# Altium PCB featherULP.PcbDoc
Units mm, origin at the board's own origin, x right, y up, seen from the top; angles counter-clockwise.
Board outline 50.8 x 22.86 mm, 2 copper layers (Top, Bottom), stack 1.57 mm thick; 19 components, 28 nets, 77 pads, 0 vias.
Unrouted connection lines stored in the file: 38.
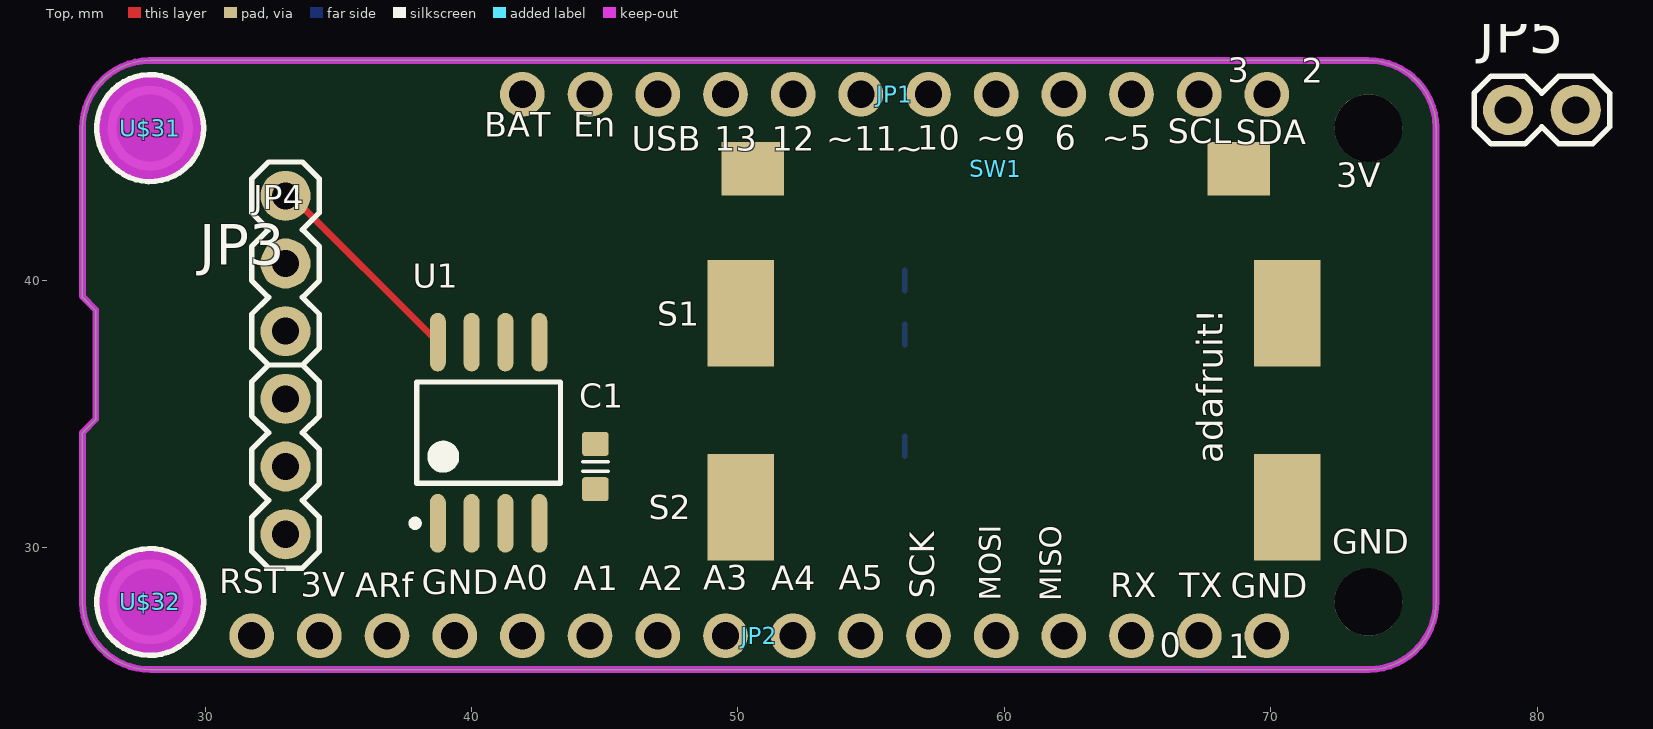
[diagram p0: Top view]
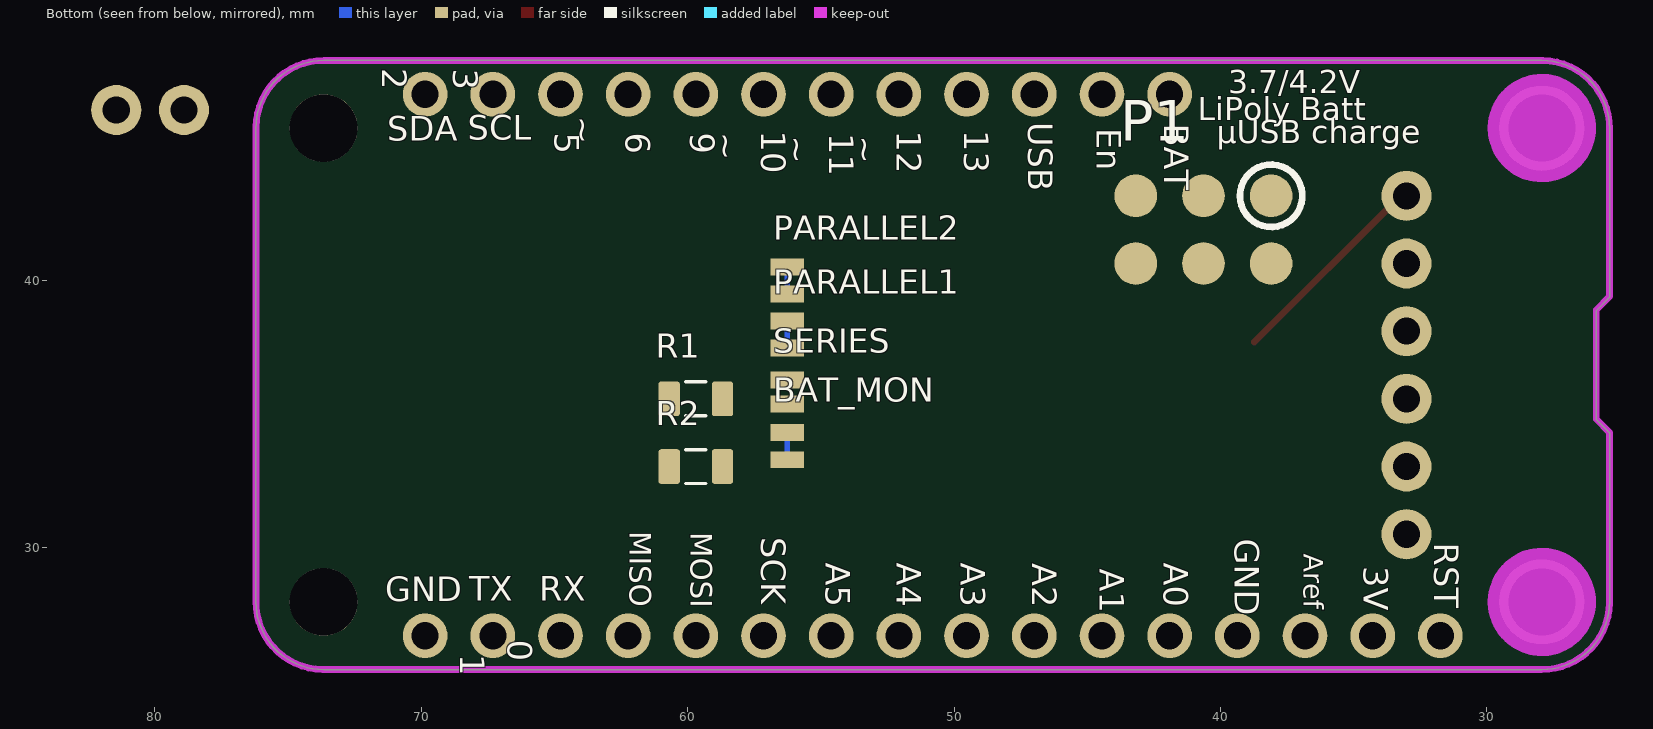
[diagram p1: Bottom view, seen from below]

## Layer stack, top to bottom
Top Solder: solder mask 0.0102, Solder Resist, Dk 3.5
Top: signal copper 0.035
Dielectric 1: core 1.5, FR-4, Dk 4.8
Bottom: signal copper 0.035
Bottom Solder: solder mask 0.0102, Solder Resist, Dk 3.5

## Board outline
27.94,25.4 73.66,25.4 ccw(c73.66,27.94) 76.2,27.94 76.2,45.72 ccw(c73.66,45.72) 73.66,48.26 27.94,48.26 ccw(c27.94,45.72) 25.4,45.72 25.4,39.37 25.908,38.862 25.908,34.798 25.4,34.29 25.4,27.94 ccw(c27.94,27.94)

## Design rules (kind name [scope] priority, off if disabled: settings)
Clearance [All] p1: gap=0.2
Clearance "Clearance (Same Net)" [All] p2: gap=0 except(0.203: SMDPad-SMDPad SMDPad-THPad SMDPad-Via)
HoleSize HoleSize_1 [All] p1: absolutevalues=TRUE maxlimit=2540 minlimit=0.394 maxpercent=80.000 minpercent=20.000
HoleSize [All] p2: absolutevalues=TRUE maxlimit=2.54 minlimit=0.025 maxpercent=80.000 minpercent=20.000
HoleToHoleClearance mdViaViaSameLayer [All] p1: gap=0.203 allowstackedmicrovias=TRUE
HoleToHoleClearance [All] p2: gap=0.254 allowstackedmicrovias=TRUE
PasteMaskExpansion mlMinCreamFrame [All] p1: expansion=0
PasteMaskExpansion [All] p2: expansion=0
PolygonConnect ThermalVias [IsVia] p1: connectstyle=Direct reliefconductorwidth=0.254 reliefentries=4 polygonreliefangle="90 Angle" airgapwidth=0.254
PolygonConnect [All] p2: connectstyle=Relief reliefconductorwidth=0.254 reliefentries=4 polygonreliefangle="90 Angle" airgapwidth=0.254
RoutingVias [All] p1: holewidth=0.711 width=1.27 viastyle="Through Hole" minholewidth=0.711 minwidth=1.27 maxholewidth=0.711 maxwidth=1.27
SilkToSilkClearance [All] p1 off: silktosilkclearance=0.254
SilkToSolderMaskClearance [IsPad] p1 off: minsilkscreentomaskgap=0.254 clearancetoexposedcopper=TRUE
SolderMaskExpansion mlMinStopFrame [All] p1: expansion=0.051
SolderMaskExpansion [All] p2: expansion=0.102
Width Width_1 [All] p1: maxlimit=1 minlimit=0.2 preferedwidth=0.25 minimp=50.000000 maximp=50.000000 favimp=50.000000
Width [All] p2: maxlimit=1 minlimit=0.2 preferedwidth=0.25 minimp=50.000000 maximp=50.000000 favimp=50.000000
25 further rules are at their usual default settings.

## Components (designator, comment, footprint, x,y, rotation, side; value= is the part's Value field where it differs from the comment)
BAT_MON "JUMPER-PAD-2-NC_BY_TRACENO_SILK" PAD-JUMPER-2-NC_BY_TRACE_NO_SILK 56.261,33.782 r90 bottom
C1 "approved sub OK" CAPC1608X90N 44.65,33.02 r270 top
JP1 "HEADER-1X12" 1X12_ROUND 55.88,46.99 r0 top
JP2 "HEADER-1X16ROUND" 1X16_ROUND 50.8,26.67 r180 top
JP3 "Header 3Standard 3-pin 0.1\" header. Use with straight break away headers (SKU : PRT-00116), right angle break away headers (PRT-00553), swiss pins (PRT-00743), machine pins (PRT-00117), and female headers (PRT-00115). Molex polarized connector foot print use with SKU : PRT-08232 with associated crimp pins and housings." 1X03 33.02,30.48 r90 top
JP4 "Header 3Standard 3-pin 0.1\" header. Use with straight break away headers (SKU : PRT-00116), right angle break away headers (PRT-00553), swiss pins (PRT-00743), machine pins (PRT-00117), and female headers (PRT-00115). Molex polarized connector foot print use with SKU : PRT-08232 with associated crimp pins and housings." 1X03 33.02,38.1 r90 top
JP5 "Standard 2-pin 0.1\" header. Use with  - straight break away headers ( PRT-00116) - right angle break away headers (PRT-00553) - swiss pins (PRT-00743) - machine pins (PRT-00117) - female headers (PRT-00115)   Molex polarized connector foot print use with: PRT-08233 with associated crimp pins and housings.  2.54_SCREWTERM for use with  PRT-10571.  3.5mm Screw Terminal footprints for  PRT-08084  5mm Screw Terminal footprints for use with PRT-08432" 1X02 78.9,46.4 r0 top
P1 "ICSP" "ICSP Pads - SMD" 38.1,43.18 r270 bottom
PARALLEL1 "JUMPER-PAD-2-NC_BY_TRACENO_SILK" PAD-JUMPER-2-NC_BY_TRACE_NO_SILK 56.261,37.973 r90 bottom
PARALLEL2 "JUMPER-PAD-2-NC_BY_TRACENO_SILK" PAD-JUMPER-2-NC_BY_TRACE_NO_SILK 56.261,40.005 r90 bottom
R1 "Thick Film" RESC2012X70N 59.69,35.56 r180 bottom
R2 "Thick Film" RESC2012X70N 59.69,33.02 r0 bottom
S1 "Solar Cell" "Solar Cell IXYS  KXOB22-01X8L-ND" 70.612,38.767 r180 top
S2 "Solar Cell" "Solar Cell IXYS  KXOB22-01X8L-ND" 70.612,31.493 r180 top
SERIES "JUMPER-PAD-2-NO" PAD-JUMPER-2-NO_NO_SILK 56.261,35.814 r90 bottom
SW1 "Reed Switch" "Reed Switch MDSM-4" 68.8,44.2 r180 top
U1 "ATtiny45-20SH" 8S2_N 40.64,34.29 r90 top
U$31 "MOUNTINGHOLE2.5" MOUNTINGHOLE_2.5_PLATED 27.94,45.72 r270 top
U$32 "MOUNTINGHOLE2.5" MOUNTINGHOLE_2.5_PLATED 27.94,27.94 r270 top

## Footprints (in the part's own frame and the unit in brackets; to place one, negate y for a bottom-side part, rotate by r counter-clockwise, add the part's x,y. Pads: shape width x height; smd on the part's side, far side on the other; paste and mask are expansions set on the pad)
1X02 [mil]
  round 74 hole 40: 1(0,0) 2(100,0)
  silkscreen extent -50,-50 150,50
1X03 [mil]
  round 74 hole 40: 1(0,0) 2(100,0) 3(200,0)
  silkscreen extent -50,-50 250,50
1X12_ROUND [mil] "1X12_ROUND"
  round 66 hole 40: 1(-550,0) 2(-450,0) 3(-350,0) 4(-250,0) 5(-150,0) 6(-50,0) 7(50,0) 8(150,0) 9(250,0) 10(350,0) 11(450,0) 12(550,0)
1X16_ROUND [mil] "1X16_ROUND"
  round 66 hole 40: 1(-750,0) 2(-650,0) 3(-550,0) 4(-450,0) 5(-350,0) 6(-250,0) 7(-150,0) 8(-50,0) 9(50,0) 10(150,0) 11(250,0) 12(350,0) 13(450,0) 14(550,0) 15(650,0) 16(750,0)
8S2_N [mm] "SOP, 8-Leads, Body 5.3x5.3mm, Pitch 1.27mm, IPC Medium Density"
  oval 2.2x0.6 smd: 1(-3.4,1.905) 2(-3.4,0.635) 3(-3.4,-0.635) 4(-3.4,-1.905) 5(3.4,-1.905) 6(3.4,-0.635) 7(3.4,0.635) 8(3.4,1.905)
  silkscreen extent -3.52,-2.7 1.9,2.88, body extent -2.7,-2.68 2.7,2.68, height 2.16
CAPC1608X90N [mm] "Chip Capacitor, Body 1.6x0.8mm, EIA 0603, IPC Medium Density"
  round 0.254 on Mech15: 0(0,0)
  rrect25% 0.9x1 smd: 1(-0.85,0) 2(0.85,0)
  Top pour cut-out: -0.6,0.5 -0.4,0.7 0.4,0.7 0.6,0.5 0.6,-0.5 0.4,-0.7 -0.4,-0.7 -0.6,-0.5
  silkscreen extent -0.18,-0.48 0.18,0.48, body extent -0.85,-0.45 0.85,0.45, height 0.89
"ICSP Pads - SMD" [mm]
  round 1.6 smd: 1(0,0) 2(2.54,0) 3(0,-2.54) 4(2.54,-2.54) 5(0,-5.08) 6(2.54,-5.08)
  silkscreen extent -1.17,-1.17 1.17,1.17
MOUNTINGHOLE_2.5_PLATED [mil] "MOUNTINGHOLE_2.5_PLATED"
  round 126 hole 99: P$1(0,0)
  Top keep-out circle w80: c0,0 r40
  Bottom keep-out circle w80: c0,0 r40
  silkscreen extent -79,-79 79,79
PAD-JUMPER-2-NC_BY_TRACE_NO_SILK [mil]
  rect 25x50 smd: 1(-20,0) 2(20,0)
  Top lines w8: -15,0 15,0
PAD-JUMPER-2-NO_NO_SILK [mm]
  rect 0.635x1.27 smd: 1(-0.45,0) 2(0.457,0)
"Reed Switch MDSM-4" [mm]
  rect 2.34x2 smd: 0(0,0) 1(18.25,0)
RESC2012X70N [mm] "Chip Resistor, Body 2.0x1.2mm, EIA 0805, IPC Medium Density"
  round 0.254 on Mech15: 0(0,0)
  rrect25% 0.8x1.3 smd: 1(-1,0) 2(1,0)
  Top pour cut-out: -0.725,0.65 -0.525,0.85 0.525,0.85 0.725,0.65 0.725,-0.65 0.525,-0.85 -0.525,-0.85 -0.725,-0.65
  silkscreen extent -0.38,-0.64 0.38,0.64, body extent -1.1,-0.67 1.1,0.68, height 0.69
"Solar Cell IXYS  KXOB22-01X8L-ND" [mm]
  rect 2.5x4 smd: +(0,0) -(20.5,0)
  body extent -0.75,-3.5 21.25,3.5, height 1.5

## Part data
C1: library part CAPC_100n_0603_X7R_50V_10%, "Capacitor SMD Cer 100nF 10% 50V X7R 0603"
JP2: "PIN HEADER"
JP3 JP4: library part M03PTH
JP5: library part M02PTH
P1: library part "Header 3X2", "Header, 3-Pin, Dual row"
R1: library part RES_1M_0805_5%, "Resistor SMD chip 1M Ohm 0.125W 5% 0805"
R2: library part RES_205K_0805_1%, "Resistor SMD chip 205k Ohm 0.125W 1% 0805"
U1: "8-bit AVR Microcontroller, 20MHz, 2.7-5.5V, 4K Flash, 256 Bytes EEPROM, 256 Bytes SRAM, Industrial Grade (-40°C to 85°C), 8-Lead SOIC, Pb-Free"
U$31 U$32: "Mounting Hole   For #2 screws (0.086\"/2.18mm width, 0.094\"/2.4mm hole) use 2.5mm"

## Free pads (board coordinates)
  round 2.54 hole 2.54: 1(73.66,27.94) 1(73.66,45.72)

## Nets (pads, with @x,y where several pads share a name; then routed paths per layer and width w, separated by ;. In a path a pad name is that pad's centre, name@x,y a point inside that pad or via, vN(x,y) a via of type N, cw(c..) or ccw(c..) an arc to the next point about the centre after c; other vN are vias at no path point)
0: JP2.3
1: JP2.2
2: JP1.12
3: JP1.11
5: JP1.10
6: JP1.9 P1.5 U1.1
9: JP1.8
10: JP1.7
11: JP1.6
12: JP1.5 JP4.2 U1.3
13: JP1.4 JP3.2 SW1.0 U1.2
+3V3: C1.1 JP2.15 JP3.3 JP4.3 P1.2 SW1.1 U1.8 | length 8
  Top w0.254: JP4.3 33.245,43.18 U1.8
A0: BAT_MON.2 JP2.12
A1: JP2.11
A2: JP2.10
A3: JP2.9
A4: JP2.8
A5: JP2.7
AREF: JP2.14
EN: JP1.2 P1.1 U1.6
ESP_RST: JP2.16 P1.3 U1.7
GND: C1.2 JP2.1 JP2.13 JP3.1 JP4.1 JP5.2 P1.6 PARALLEL2.2 R2.2 S1.- U1.4
MOSI: P1.4 U1.5
NetBAT_MON_1: BAT_MON.1 R1.2 R2.1
NetPARALLEL1_1: PARALLEL1.1 S1.+ SERIES.2
NetPARALLEL2_1: PARALLEL2.1 S2.- SERIES.1
VBAT: JP1.1 R1.1
VBUS: JP1.3 JP5.1 PARALLEL1.2 S2.+
pads on no net: C1.0 JP2.4 JP2.5 JP2.6 R1.0 R2.0 U$31.P$1 U$32.P$1

## Keep-outs
Keep-Out Layer:
  lines w0.254: 25.4,27.901 ccw(c27.94,27.94) 27.96,25.4 73.699,25.4 ccw(c73.66,27.94) 76.2,27.96 76.2,45.759 ccw(c73.66,45.72) 73.64,48.26 27.901,48.26 ccw(c27.94,45.72) 25.4,45.7 25.4,39.4 25.9,38.9 25.9,34.8 25.4,34.3 25.4,27.901

## Silkscreen, mask and mechanical layers (free items; w line width, h text height)
Top Overlay:
  text "3" at 68.377,47.145 h1.57
  text "2" at 71.167,47.119 h1.57
  text "BAT" at 40.482,45.089 h1.57
  text "En" at 43.821,45.089 h1.57
  text "SCL" at 66.125,44.852 h1.57
  text "SDA" at 68.689,44.818 h1.57
  text "10" at 56.732,44.605 h1.57
  text "~9" at 58.949,44.605 h1.57
  text "6" at 61.897,44.605 h1.57
  text "~5" at 63.645,44.613 h1.57
  text "13" at 49.11,44.571 h1.57
  text "12" at 51.275,44.579 h1.57
  text "~11" at 53.322,44.579 h1.57
  text "USB" at 46.016,44.564 h1.57
  text "~" at 55.91,44.207 h1.57
  text "3V" at 72.453,43.208 h1.57
  text "adafruit!" at 68.199,33.147 h0.97 r90
  text "GND" at 72.297,29.451 h1.57
  text "A0" at 41.207,28.095 h1.57
  text "A3" at 48.698,28.095 h1.57
  text "A5" at 53.774,28.097 h1.57
  text "A1" at 43.842,28.069 h1.57
  text "A2" at 46.291,28.069 h1.57
  text "A4" at 51.24,28.071 h1.57
  text "SCK" at 57.671,28.05 h1.57 r90
  text "MOSI" at 60.117,27.99 h1.38 r90
  text "RST" at 30.539,27.961 h1.57
  text "MISO" at 62.403,27.962 h1.38 r90
  text "GND" at 38.134,27.927 h1.57
  text "3V" at 33.591,27.841 h1.57
  text "ARf" at 35.629,27.809 h1.57
  text "RX" at 63.98,27.817 h1.57
  text "TX" at 66.56,27.817 h1.57
  text "GND" at 68.487,27.8 h1.57
  text "0" at 65.839,25.555 h1.57
  text "1" at 68.395,25.529 h1.57
Bottom Overlay:
  text "3" at 69.094,47.955 h1.57 r90
  text "2" at 71.753,47.959 h1.57 r90
  text "3.7/4.2V" at 39.701,47.03 h0.86
  text "LiPoly Batt" at 40.852,46.023 h0.86
  text "USB" at 47.511,45.932 h1.57 r90
  text "BAT" at 42.414,45.878 h1.57 r90
  text "En" at 44.954,45.714 h1.57 r90
  text "13" at 49.917,45.632 h1.57 r90
  text "12" at 52.449,45.626 h1.57 r90
  text "10" at 57.537,45.63 h1.57 r90
  text "~" at 59.295,45.563 h1.57 r90
  text "11" at 54.989,45.535 h1.57 r90
  text "9" at 60.204,45.543 h1.57 r90
  text "6" at 62.617,45.545 h1.57 r90
  text "5" at 65.276,45.546 h1.57 r90
  text "~" at 54.088,45.436 h1.57 r90
  text "~" at 56.628,45.436 h1.57 r90
  text "µUSB charge" at 40.133,45.159 h0.86
  text "~" at 63.26,45.115 h1.57 r270
  text "SCL" at 68.241,44.979 h1.57
  text "SDA" at 71.265,44.945 h1.57
  text "MISO" at 62.432,30.585 h1.38 r90
  text "MOSI" at 60.146,30.557 h1.38 r90
  text "SCK" at 57.544,30.37 h1.57 r90
  text "GND" at 39.764,30.319 h1.57 r90
  text "RST" at 32.271,30.167 h1.57 r90
  text "Aref" at 37.119,29.755 h1.26 r90
  text "A0" at 42.424,29.403 h1.57 r90
  text "A3" at 50.044,29.404 h1.57 r90
  text "A4" at 52.447,29.402 h1.57 r90
  text "A5" at 55.122,29.408 h1.57 r90
  text "A2" at 47.369,29.399 h1.57 r90
  text "3V" at 34.931,29.274 h1.57 r90
  text "A1" at 44.829,29.18 h1.57 r90
  text "RX" at 65.56,27.69 h1.57
  text "TX" at 68.187,27.69 h1.57
  text "GND" at 71.34,27.673 h1.57
  text "1" at 68.832,25.966 h1.57 r90
  text "0" at 65.526,25.707 h1.57 r270
tDocu:
  lines w0.254: 25.908,36.83 76.2,36.83

## Dimensions
25.4,39.878 to 76.2,39.243 on Measures
27.94,45.72 to 73.66,45.72 on Measures
27.94,45.72 to 27.94,27.94 on Measures
29.845,48.26 to 30.175,25.4 on Measures
72.39,28.016 to 75.006,27.94 on Measures